# EAGLE board Team_SAFE_AlertingCircuit final_PCB (EAGLE 9.7.0)
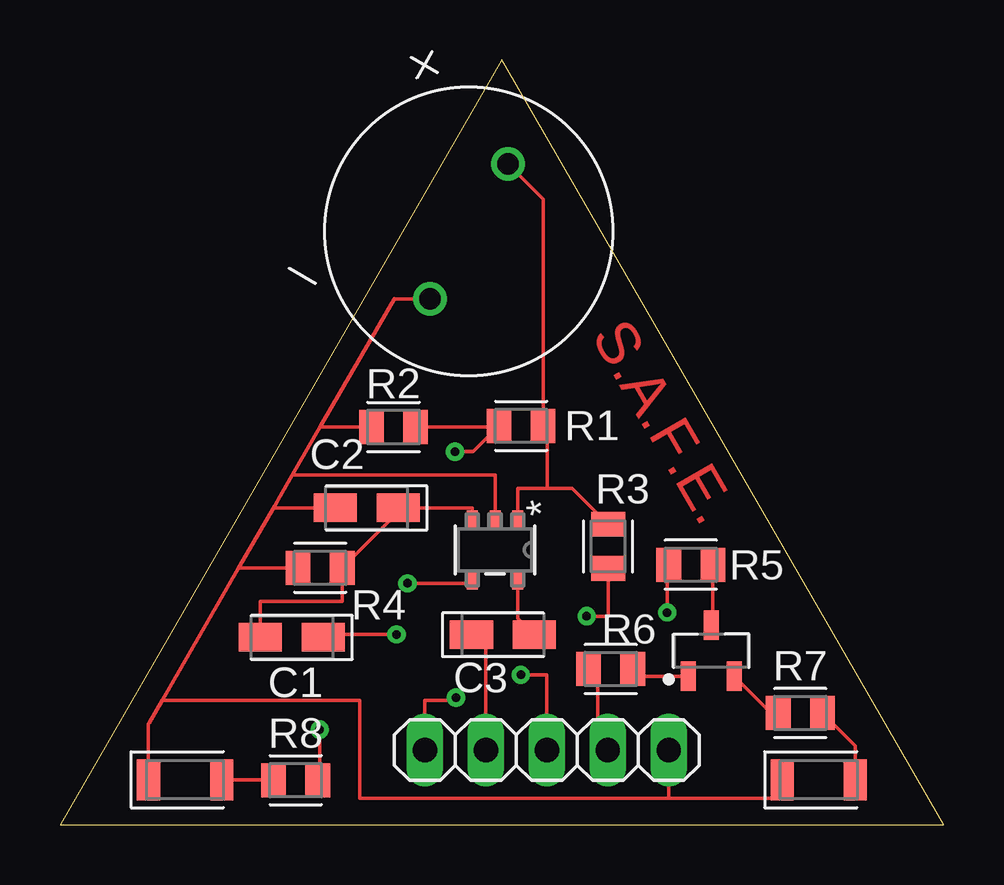
[diagram p0: board, top side]
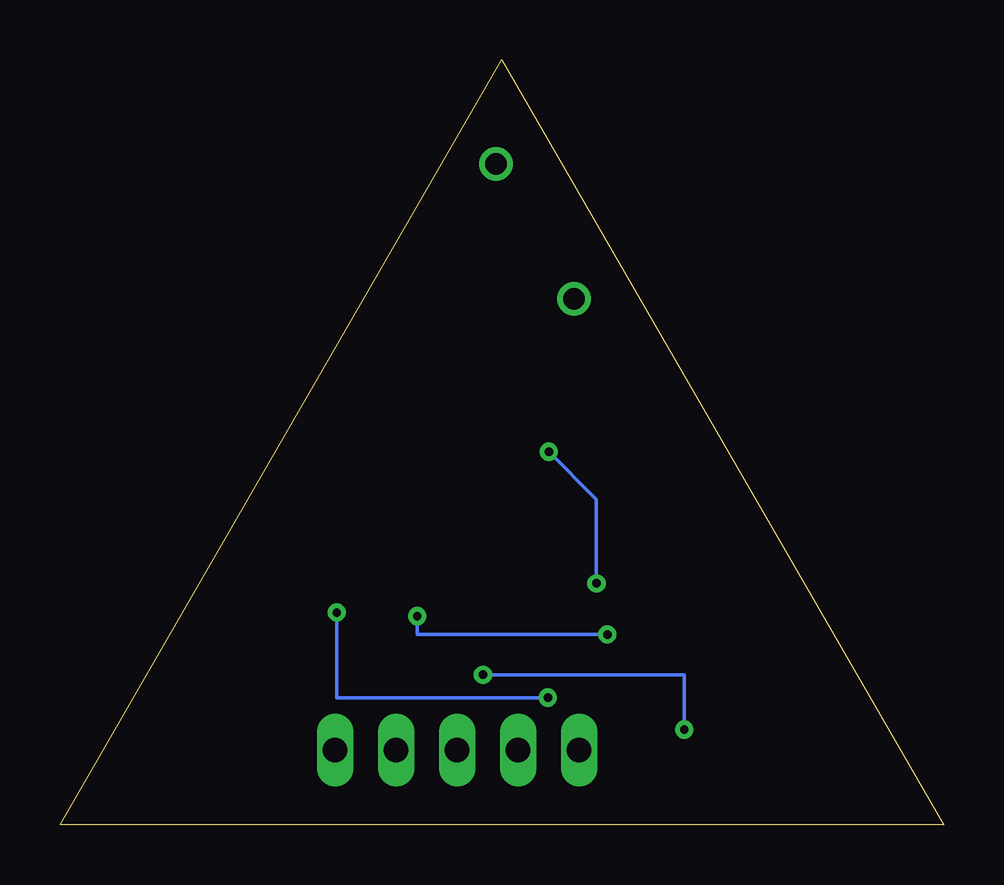
[diagram p1: board, bottom side, seen from below]

Size 36.83 x 31.88 mm. Coordinates in mm from the lower left corner, seen from the top.
Outline: 0,0 36.83,0 18.41,31.88 0,0
Copper layers (1*16): Top / Bottom
Stack-up Default Layer Stack: Top User Defined 0.035mm / Dielectric-1 User Defined 1.5mm / Bottom User Defined 0.035mm
Design rules: minimum copper width 6mil, minimum drill size 0.35mm, copper clearance wire_polygon to wire_polygon 6mil, copper clearance wire_polygon to pad_smd 6mil, copper clearance wire_polygon to via 6mil, copper clearance pad_smd to pad_smd 6mil, copper clearance pad_smd to via 6mil, copper clearance via to via 6mil, copper clearance smd to pad (same net) 6mil, copper clearance smd to via (same net) 6mil, copper clearance smd to smd (same net) 6mil, dimension clearance 40mil, via restrict clearance 0mil, restrict clearance 0mil, drill distance 6mil, keepout clearance 0mil

## Footprints (pad centres in the part's own frame; a part is rotated, then mirrored left to right if it is on the bottom)
CAPMP3216X180N = smd 1.796 x 1.189: 1 -1.31,0; 2 1.31,0
LEDC3216X180N_RND-R = smd 0.962 x 1.712: A 1.525,0; C -1.525,0
LEDC3216X180N_RND-G = smd 0.962 x 1.712: A 1.525,0; C -1.525,0
1X05 = drill 1.016 long: 1 -5.08,0; 2 -2.54,0; 3 0,0; 4 2.54,0; 5 5.08,0
XDCR_AT-1220-TT-R = drill 0.9: N 0,-3.25; P 0,3.25
SOT95P237X112-3N = smd 1.224 x 0.625: 1 -1.064,0.95; 2 -1.064,-0.95; 3 1.064,0
RESC2012X65 = smd 1.031 x 1.42: 1 -0.919,0; 2 0.919,0
SOT-23-5_DBV_TEX-L = smd 0.775 x 0.457: 1 -1.264,0.95; 2 -1.264,0; 3 -1.264,-0.95; 4 1.264,-0.95; 5 1.264,0.95

## Placement (x,y rotation side)
C1  [CAPMP3216X180N]  9.66,7.81 180 top
C2  [CAPMP3216X180N]  12.78,13.2 180 top
C3  [CAPMP3216X180N]  18.45,7.92 0 top
D1  LED_RED  [LEDC3216X180N_RND-R]  5.21,1.87 0 top
D2  LED_GREEN  [LEDC3216X180N_RND-G]  31.62,1.87 0 top
JP1  PINHD-1X5  [1X05]  20.28,3.11 0 top
LS1  AT-1220-TT-R  [XDCR_AT-1220-TT-R]  17.04,24.73 330 top
Q1  MMBT3904L  [SOT95P237X112-3N]  27.14,7.25 90 top
R1  20k  [RESC2012X65]  19.21,16.62 180 top
R2  10k  [RESC2012X65]  13.89,16.57 180 top
R3  10k  [RESC2012X65]  22.84,11.6 270 top
R4  10k  [RESC2012X65]  10.84,10.71 180 top
R5  [RESC2012X65]  26.29,10.83 0 top
R6  [RESC2012X65]  22.94,6.48 0 top
R7  [RESC2012X65]  30.85,4.65 0 top
R8  1k  [RESC2012X65]  9.82,1.85 180 top
U1  TL081HIDBVRSOT-23-5_DBV_TEX-L  [SOT-23-5_DBV_TEX-L]  18.13,11.45 270 top

## Library data of the parts
C1-C3 = Capacitor; CATEGORY: Capacitor
D1 = LED; CATEGORY: LED; COLOR: RED; DESCRIPTION: CHIP LED ROUND; SUB-CATEGORY: CHIP; TYPE: ROUND_TOP
D2 = LED; CATEGORY: LED; COLOR: GREEN; DESCRIPTION: CHIP LED ROUND; SUB-CATEGORY: CHIP; TYPE: ROUND_TOP
JP1 = Connector; CATEGORY: Headers; DESCRIPTION: Header, Straight, 5 Position; MANUFACTURER: Generic; MPN: Generic; OPERATING_TEMPERATURE: Generic; PART_STATUS: Active; PITCH: 0.100" (2.54mm); ROHS_COMPLIANCE: Generic; SERIES: Generic; SUB-CATEGORY: Headers, Male Pins; TYPE: Board to Board or Cable, Unshrouded, Through Hole, Straight
LS1 = AT-1220-TT-R; MANUFACTURER: PUI Audio; MAXIMUM_PACKAGE_HEIGHT: 9.8 mm; PARTREV: 2014/07/25; STANDARD: Manufacturer Recommendations
Q1 = Transistor; CATEGORY: Transistor; DESCRIPTION: TRANS NPN 40V 0.2A SOT23; MANUFACTURER: ON Semiconductor; SUB-CATEGORY: BJT; TYPE: NPN
R1-R8 = Tinkercad; CATEGORY: Resistor; SUB-CATEGORY: Fixed
U1 = 2024-11-09_00-50-43_Library; COPYRIGHT: Copyright (C) 2024 Ultra Librarian. All rights reserved.; MANUFACTURER_PART_NUMBER: TL081HIDBVR; MFR_NAME: Texas Instruments

## Nets
3.3V: JP1.3 R8.1
5V_1: JP1.1 R5.1
5V_2: C3.1 JP1.2
GND: C2.2 D1.C D2.C JP1.5 LS1.N R2.2 R4.2 U1.2
N$1: R1.2 R2.1 U1.4
N$4: C1.1 R3.2
N$5: C1.2 C2.1 R4.1 U1.3
N$6: C3.2 U1.5
N$7: Q1.3 R5.2
N$8: Q1.1 R6.2
N$9: Q1.2 R7.1
N$10: D2.A R7.2
N$13: D1.A R8.2
SENSOR_OUT: JP1.4 R6.1
SINE_WAVE: LS1.P R1.1 R3.1 U1.1

## Tracks (layer width: path | path; a pad name or v marks a point on that pad's centre or on a via)
3.3V  (via drill 0.35)
  Top 0.152: R8.1 10.82,1.85 v10.82,3.96 | JP1.3 20.28,6.25 v19.2,6.25
  Bottom 0.152: v19.2,6.25 10.82,6.25 v10.82,3.96
5V_1  (via drill 0.35)
  Top 0.152: JP1.1 15.2,5.18 16.5,5.18 v16.5,5.29 | v25.3,8.84 25.3,10.83 R5.1
  Bottom 0.152: v16.5,5.29 25.3,5.29 v25.3,8.84
5V_2
  Top 0.152: C3.1 17.74,7.32 JP1.2
GND
  Top 0.152: JP1.5 25.36,1.09 | 25.36,1.09 12.5,1.09 12.5,5.19 4.26,5.19 | LS1.N 13.93,21.92 | 13.93,21.92 | 13.93,21.92 13.92,21.92 10.85,16.59 | 10.85,16.59 9.69,14.58 | 9.69,14.58 9.18,13.7 8.94,13.29 | 8.94,13.29 7.43,10.69 | 7.43,10.69 4.26,5.19 | 4.26,5.19 3.71,4.24 3.69,4.2 D1.C | 25.36,1.09 30.09,1.09 D2.C | R2.2 10.85,16.57 10.85,16.59 | C2.2 8.94,13.2 8.94,13.29 | R4.2 7.46,10.71 7.43,10.69 | U1.2 18.13,14.58 9.69,14.58
N$1  (via drill 0.35)
  Top 0.152: R2.1 18.29,16.57 R1.2 17.21,15.54 v16.46,15.54 | v14.48,10.06 17.05,10.06 U1.4
  Bottom 0.152: v16.46,15.54 14.48,13.56 v14.48,10.06
N$4  (via drill 0.35)
  Top 0.152: R3.2 22.84,8.69 v21.95,8.69 | v14.02,7.92 10.97,7.92 C1.1
  Bottom 0.152: v21.95,8.69 21.95,7.92 v14.02,7.92
N$5
  Top 0.152: C1.2 8.35,9.3 11.76,9.3 R4.1 14.09,13.03 C2.1 17.18,13.2 U1.3
N$6
  Top 0.152: U1.5 19.08,8.6 C3.2
N$7
  Top 0.152: R5.2 27.2,8.38 Q1.3
N$8
  Top 0.152: Q1.1 24.16,6.18 R6.2
N$9
  Top 0.152: R7.1 29.62,4.65 Q1.2
N$10
  Top 0.152: D2.A 33.14,3.28 R7.2
N$13
  Top 0.152: D1.A 8.88,1.87 R8.2
SENSOR_OUT
  Top 0.152: JP1.4 22.4,3.53 22.4,6.11 R6.1
SINE_WAVE
  Top 0.152: U1.1 19.08,14.02 20.3,14.02 | 20.3,14.02 20.3,16.62 R1.1 20.13,26.08 LS1.P | R3.1 21.34,14.02 20.3,14.02

## Text on the board
Top: S.A.F.E.